# Altium PCB CN3903模块_2024-02-19.pcbdoc
Units mm, origin at the board's own origin, x right, y up, seen from the top; angles counter-clockwise.
Board outline 50.9 x 39.51 mm, 2 copper layers (Top Layer, Bottom Layer); 1 components, 0 nets, 4 pads, 0 vias.
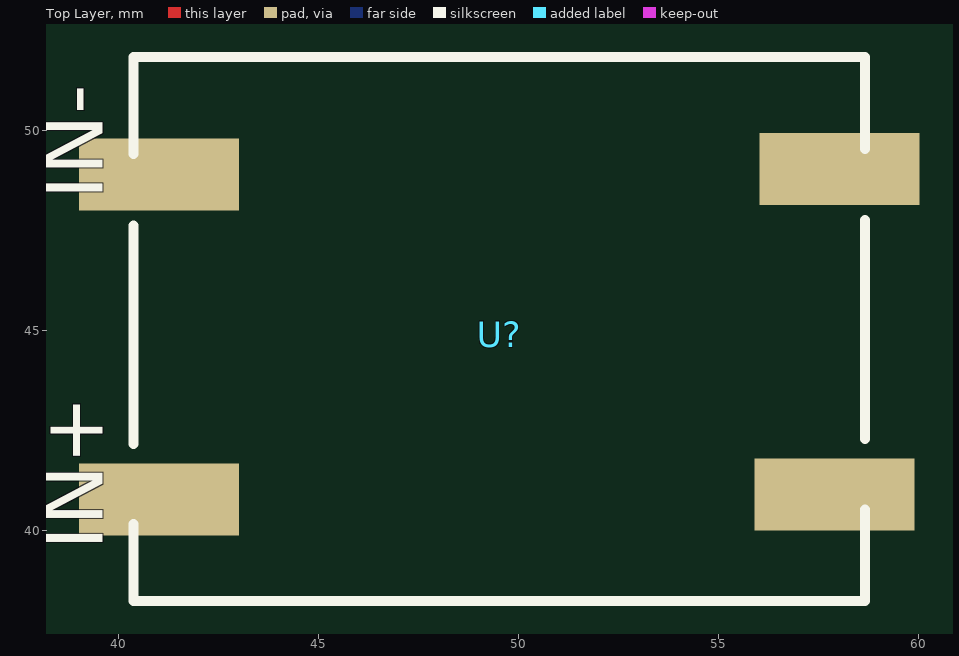
[diagram p0: Top Layer view]
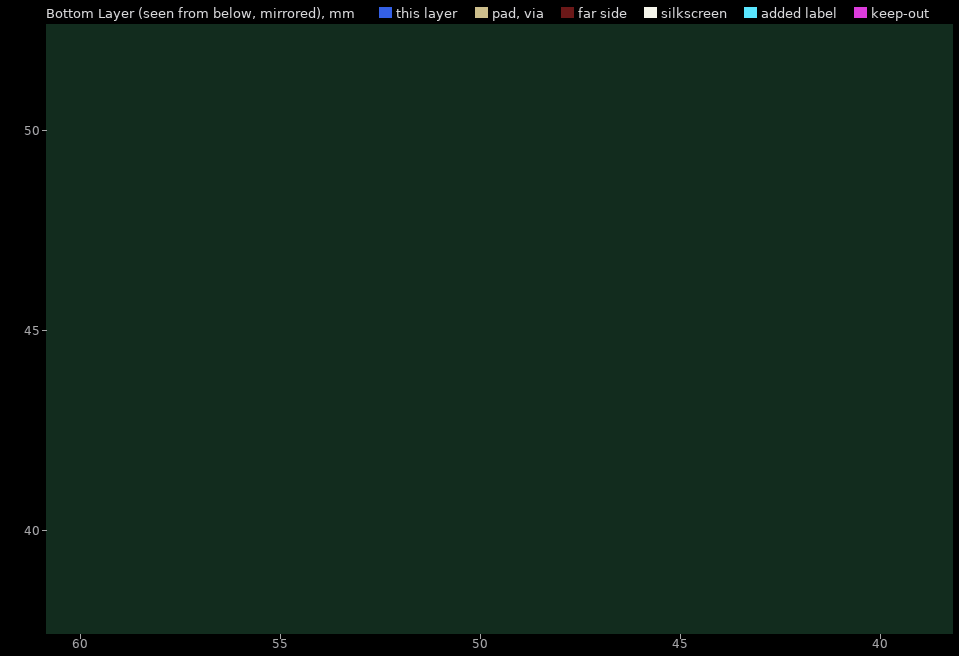
[diagram p1: Bottom Layer view, seen from below]

## Layer stack, top to bottom
Top Layer: signal copper (thickness not stored)
Dielectric: dielectric 0.32, FR-4, Dk 4.8
Bottom Layer: signal copper (thickness not stored)

## Board outline
76.303,25.4 25.4,25.4 25.4,64.91 76.303,64.91

## Components (designator, comment, footprint, x,y, rotation, side; value= is the part's Value field where it differs from the comment)
U? "CN3903模块" CN3903模块 50.343,45.028 r0 top

## Footprints (in the part's own frame and the unit in brackets; to place one, negate y for a bottom-side part, rotate by r counter-clockwise, add the part's x,y. Pads: shape width x height; smd on the part's side, far side on the other; paste and mask are expansions set on the pad)
CN3903模块 [mm]
  rect 4x1.8 smd paste+0 mask+0.051: 1(-9.335,3.867) 2(-9.335,-4.261) 3(7.684,3.994) 4(7.557,-4.134)
  silkscreen extent -9.97,-6.8 8.32,6.8

## Nets (pads, with @x,y where several pads share a name; then routed paths per layer and width w, separated by ;. In a path a pad name is that pad's centre, name@x,y a point inside that pad or via, vN(x,y) a via of type N, cw(c..) or ccw(c..) an arc to the next point about the centre after c; other vN are vias at no path point)
pads on no net: U?.1 U?.2 U?.3 U?.4

## Silkscreen, mask and mechanical layers (free items; w line width, h text height)
Document:
  lines w0.003: 50.851,45.155 50.852,45.155

## Text inside footprints (layer, text, board x,y; h text height)
U?: Top Overlay "IN-" at 39.6,48.26 h1.5 r90; Top Overlay "IN+" at 39.6,39.497 h1.5 r90; Top Overlay "OUT-" at 62.587,46.863 h1.5 r90; Top Overlay "OUT+" at 62.46,38.354 h1.5 r90